# EAGLE board rpi_breakout (EAGLE 6.1)
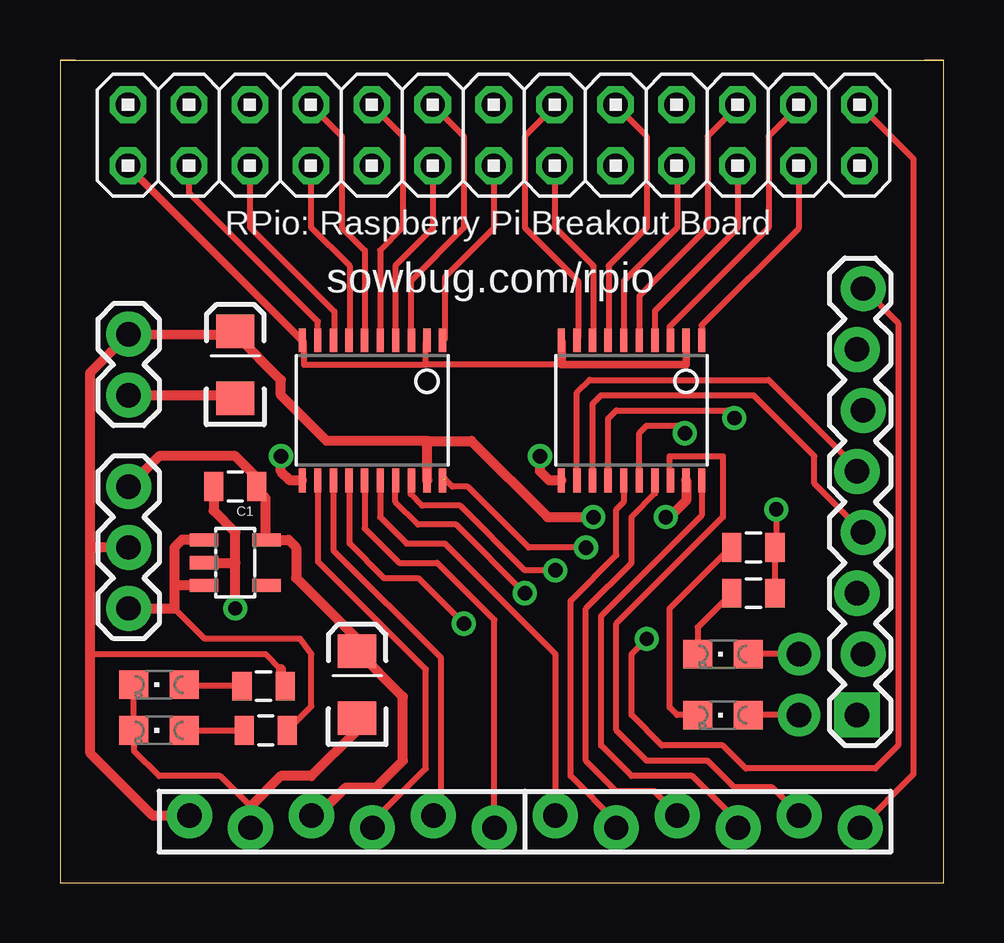
[diagram p0: board, top side]
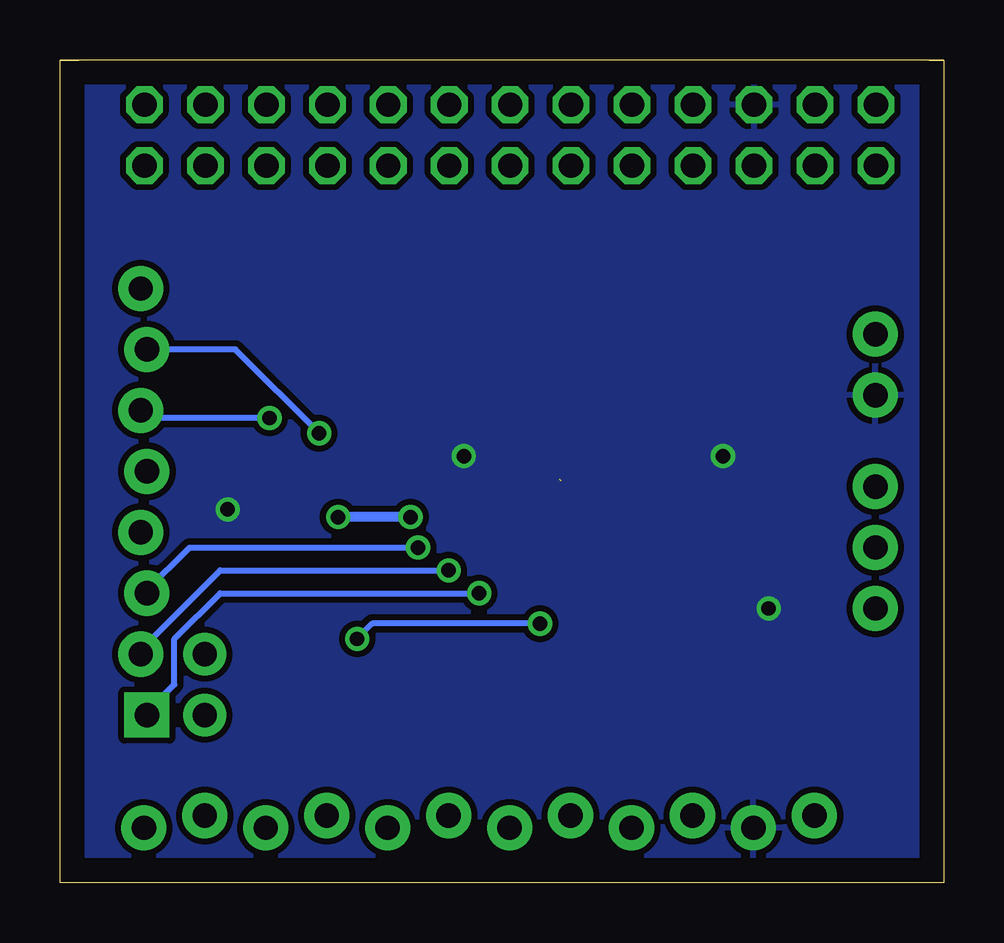
[diagram p1: board, bottom side, seen from below]

Size 36.83 x 34.29 mm. Coordinates in mm from the lower left corner, seen from the top.
Outline: 36.83,34.29 36.83,0 0,0 0,34.29
Outline: 36.83,34.29 36.04,34.29
Outline: 0.64,34.29 0,34.29
Outline: 0,34.29 36.83,34.29
Copper layers (1*16): Top 0.035mm / dielectric 1.5mm / Bottom 0.035mm
Design rules: minimum track width 10mil, minimum drill 24mil, track to track 8mil, track to pad 8mil, pad to pad 8mil, via to via 8mil, smd to smd 8mil, copper to edge 40mil, drill to drill 8mil, minimum pad ring 10mil, minimum via ring 8mil, stop-mask expansion 4mil, vias tented up to drill 0mil, thermal gap 10mil
Net classes: 0 default: width 0.254 mm, clearance 0.254 mm; 1 power/gnd: width 0.406 mm, clearance 0.254 mm; 2 skinny: width 0.203 mm, clearance 0.203 mm

## Footprints (pad centres in the part's own frame; a part is rotated, then mirrored left to right if it is on the bottom)
0805 = smd 0.8 x 1.2: 1 -0.9,0; 2 0.9,0
EIA3216 = smd 1.4 x 1.6: A 1.4,0; C -1.4,0
2X13 = drill 1.016 octagon: 1 -15.24,-1.27; 2 -15.24,1.27; 3 -12.7,-1.27; 4 -12.7,1.27; 5 -10.16,-1.27; 6 -10.16,1.27; 7 -7.62,-1.27; 8 -7.62,1.27; 9 -5.08,-1.27; 10 -5.08,1.27; 11 -2.54,-1.27; 12 -2.54,1.27; 13 0,-1.27; 14 0,1.27; 15 2.54,-1.27; 16 2.54,1.27; 17 5.08,-1.27; 18 5.08,1.27; 19 7.62,-1.27; 20 7.62,1.27; 21 10.16,-1.27; 22 10.16,1.27; 23 12.7,-1.27; 24 12.7,1.27; 25 15.24,-1.27; 26 15.24,1.27
1X08_LOCK = drill 1.016 pad 1.88 square: 1 0,0.127 | drill 1.016 pad 1.88: 2 2.54,-0.127; 3 5.08,0.127; 4 7.62,-0.127; 5 10.16,0.127; 6 12.7,-0.127; 7 15.24,0.127; 8 17.78,-0.127
1X06_FEMALE_LOCK.010 = drill 1.016 pad 1.88: 1 0,0.254; 2 2.54,-0.254; 3 5.08,0.254; 4 7.62,-0.254; 5 10.16,0.254; 6 12.7,-0.254
1X02 = drill 1.016 pad 1.88: 1 0,0; 2 2.54,0
1X03 = drill 1.016 pad 1.88: 1 0,0; 2 2.54,0; 3 5.08,0
1X01-CLEANBIG = drill 1.016 pad 1.778: 1 0,0
CHIPLED_0805 = smd 1.2 x 1.2: A 0,-1.05; C 0,1.05
TSSOP20 = smd 0.305 x 0.991: 1 -2.925,-2.918; 2 -2.275,-2.918; 3 -1.625,-2.918; 4 -0.975,-2.918; 5 -0.325,-2.918; 6 0.325,-2.918; 7 0.975,-2.918; 8 1.625,-2.918; 9 2.275,-2.918; 10 2.925,-2.918; 11 2.925,2.918; 12 2.275,2.918; 13 1.625,2.918; 14 0.975,2.918; 15 0.325,2.918; 16 -0.325,2.918; 17 -0.975,2.918; 18 -1.625,2.918; 19 -2.275,2.918; 20 -2.925,2.918
SOT-23-5 = smd 0.55 x 1.2: 1 -0.95,-1.3; 2 0,-1.3; 3 0.95,-1.3; 4 0.95,1.3; 5 -0.95,1.3

## Placement (x,y rotation side)
C1  0.1uF  [0805]  7.3,16.51 180 top
C2  10uF  [EIA3216]  12.38,8.26 90 top
C3  10uF  [EIA3216]  7.3,21.59 90 top
JP1  RPI  [2X13]  18.07,31.16 0 top
JP2  GPIO  [1X08_LOCK]  33.34,6.98 90 top
JP3  [1X06_FEMALE_LOCK.010]  5.4,2.54 0 top
JP4  [1X06_FEMALE_LOCK.010]  20.64,2.54 0 top
JP5  IO-PWR-EXT  [1X02]  2.86,22.86 270 top
JP6  VTG-SEL  [1X03]  2.86,16.51 270 top
JP7  [1X01-CLEANBIG]  30.8,9.53 0 top
JP8  [1X01-CLEANBIG]  30.8,6.98 0 top
LED1  CONNECTED  [CHIPLED_0805]  4.13,6.35 90 top
LED2  IO-POWER  [CHIPLED_0805]  4.13,8.26 90 top
LED3  BLINKY  [CHIPLED_0805]  27.62,9.53 90 top
LED4  BLINKY  [CHIPLED_0805]  27.62,6.98 90 top
R1  330  [0805]  8.57,6.35 180 top
R2  330  [0805]  8.48,8.19 180 top
R3  330  [0805]  28.89,12.06 0 top
R4  330  [0805]  28.89,13.97 0 top
U2  [TSSOP20]  23.81,19.69 180 top
U3  [TSSOP20]  13.02,19.69 180 top
VREG1  3.3V  [SOT-23-5]  7.3,13.33 270 top

## Library data of the parts
C1-C3 JP3-JP6 R1-R4 = SparkFun
JP1 = pinhead
JP2 U2 U3 = rpi_breakout
JP7 JP8 LED1-LED4 = adafruit
VREG1 = dp_devices

## Nets
3.3V [power/gnd]: C1.1 C2.A JP3.3 JP6.1 VREG1.5
3V3_RPI: JP1.1 U2.2 U2.10 U3.2 U3.10
5V [power/gnd]: JP6.3 R1.1 VREG1.1 VREG1.3
5V0: JP1.2
/SPI_CE0: JP1.24 U2.3
/SPI_CE1: JP1.26 JP4.6
/SPI_CEV0: JP4.5 U2.18
GND [power/gnd]: C1.2 C2.C C3.C JP1.6 JP3.2 JP5.2 LED1.C LED2.C R3.2 R4.2 U2.11 U3.11 VREG1.2
GPIO_0: JP1.11 U3.4
GPIO_1: JP1.12 U3.3
GPIO_2: JP1.13 U3.1
GPIO_3: JP1.15 U2.8
GPIO_4: JP1.16 U2.9
GPIO_5: JP1.18 U2.7
GPIO_6: JP1.22 U2.5
GPIO_7: JP1.7 U3.7
GPIOV_0: JP2.1 U3.17
GPIOV_1: JP2.2 U3.18
GPIOV_2: JP2.3 U3.20
GPIOV_3: JP2.4 U2.13
GPIOV_4: JP2.5 U2.12
GPIOV_5: JP2.6 U2.14
GPIOV_6: JP2.7 U2.16
GPIOV_7: JP2.8 U3.14
LED3_JP: JP7.1 LED3.A
LED4_JP: JP8.1 LED4.A
N$1: LED1.A R1.2
N$2: LED2.A R2.2
N$3: LED3.C R3.1
N$4: LED4.C R4.1
NC_0: JP1.4
NC_1: JP1.14
NC_2: JP1.20
NC_3: JP1.9
NC_4: JP1.17
NC_5: JP1.25
RXD: JP1.10 U3.5
RXDV: JP4.1 U3.16
SCL0: JP1.5 U3.8
SCLV0: JP3.5 U3.13
SDA0: JP1.3 U3.9
SDAV0 [skinny]: JP3.4 U3.12
SPI_MISO: JP1.21 U2.4
SPI_MISOV: JP4.3 U2.17
SPI_MOSI: JP1.19 U2.6
SPI_MOSIV: JP4.2 U2.15
SPI_SCLK: JP1.23 U2.1
SPI_SCLKV: JP4.4 U2.20
TXD: JP1.8 U3.6
TXDV: JP3.6 U3.15
VCC [power/gnd]: C3.A JP3.1 JP5.1 JP6.2 R2.1 U2.19 U3.19

## Tracks (layer width: path | path; a pad name or v marks a point on that pad's centre or on a via)
3.3V
  Top 0.254: 8.26,16.35 8.26,16.46 C1.1
  Top 0.406: VREG1.5 8.57,14.31 8.57,16.03 8.26,16.35 8.26,16.83 7.3,17.78 4.13,17.78 JP6.1 | VREG1.5 8.6,14.26 | JP3.3 10.64,2.95 10.89,2.95 11.91,3.97 13.18,3.97 14.29,5.08 14.29,7.75 C2.A 12.38,10.16 9.84,12.7 9.84,13.97 9.53,14.29 VREG1.5
3V3_RPI
  Top 0.254: JP1.1 2.83,29.86 | U3.10 10.16,22.54 10.16,21.59 15.24,21.59 | 15.24,21.59 15.24,22.54 U3.2 | U2.10 20.96,22.54 20.96,21.59 15.24,21.59
  Top 0.305: U2.10 20.89,21.59 20.96,21.59 26.09,21.59 U2.2 | U3.10 2.83,29.86 | U3.2
5V
  Top 0.254: 4.76,11.43 6.03,10.16 10,10.16 10.48,9.53 10.48,7.35 R1.1
  Top 0.406: JP6.3 4.76,11.43 4.76,12.22 | VREG1.1 5.08,14.29 4.76,13.97 4.76,12.22 | VREG1.3 4.92,12.38 4.76,12.22
/SPI_CE0
  Top 0.254: JP1.24 30.77,32.36 29.53,31.12 29.53,27.31 25.4,23.18 25.4,22.64 U2.3
/SPI_CE1
  Top 0.254: JP1.26 35.56,30.18 35.56,4.52 JP4.6
/SPI_CEV0
  Top 0.254: U2.18 25.4,16.81 25.4,17.78 27.62,17.78 27.62,15.24 23.18,10.79 23.18,6.35 24.45,5.08 26.99,5.08 28.1,3.97 29.69,3.97 30.8,2.86 JP4.5
GND  (via drill 0.6)
  Top 0.254: R3.2 R4.2 29.85,13.97 v29.85,15.56 | 7.94,3.17 6.67,4.45 4.13,4.45 3.08,5.5 LED1.C LED2.C
  Top 0.406: VREG1.2 7.3,13.33 | U3.11 9.58,16.77 9.21,17.15 v9.21,17.78 | C1.2 6.4,15.5 7.3,14.61 7.3,13.33 | v7.3,11.43 7.3,13.33 | JP5.2 7.17,20.32 C3.C 7.3,19.69 | JP3.2 7.94,3.17 9.21,4.45 10.48,4.45 12.38,6.35 C2.C | U2.11 20.38,16.77 20,17.15 v20,17.78
  pour Bottom: 0,0 36.83,0 36.83,34.29 0,34.29
GPIO_0
  Top 0.254: JP1.11 15.53,27.28 13.97,25.72 13.97,22.62 U3.4
GPIO_1
  Top 0.254: JP1.12 15.53,32.41 16.83,31.12 16.83,27.31 14.61,25.08 14.61,22.54 14.64,22.58 U3.3
GPIO_2
  Top 0.254: JP1.13 18.07,27.28 16.03,25.24 16.03,22.67 U3.1
GPIO_3
  Top 0.254: JP1.15 20.61,27.33 22.23,25.72 22.23,22.64 U2.8
GPIO_4
  Top 0.254: JP1.16 20.61,32.36 19.37,31.12 19.37,27.31 21.59,25.08 21.59,22.86 | 21.59,22.86 21.59,22.7 | U2.9 21.54,22.81 21.59,22.86
GPIO_5
  Top 0.254: JP1.18 23.15,32.41 24.45,31.12 24.45,27.31 22.86,25.72 22.86,22.62 U2.7
GPIO_6
  Top 0.254: JP1.22 28.23,32.36 26.99,31.12 26.99,27.31 24.14,24.46 U2.5
GPIO_7
  Top 0.254: JP1.7 10.45,27.33 12.06,25.72 12.06,22.62 U3.7
GPIOV_0  (via drill 0.6)
  Top 0.254: 13.97,16.75 U3.17 13.99,16.53 13.97,16.51 | v19.37,12.06 16.51,14.92 14.92,14.92 13.97,15.88 13.97,16.51 | 13.97,16.51 13.97,16.83
  Bottom 0.254: v19.37,12.06 30.16,12.06 32.07,10.16 32.07,8.26 33.21,7.11 JP2.1
GPIOV_1  (via drill 0.6)
  Top 0.254: U3.18 14.61,16.73 14.61,16.19 15.08,15.72 16.67,15.72 19.37,13.02 v20.64,13.02
  Bottom 0.254: v20.64,13.02 30.16,13.02 33.43,9.75 33.43,9.59 JP2.2
GPIOV_2  (via drill 0.6)  (1 unrouted)
  Top 0.254: U3.20 15.97,16.77 | v21.92,13.97 19.53,13.97 16.99,16.51 16.35,16.51 16.03,16.83
  Bottom 0.254: v21.92,13.97 31.43,13.97 33.27,12.13 | JP2.3 33.27,12.13 | 33.27,12.13 33.34,12.06
GPIOV_3
  Top 0.254: U2.13 22.19,19.96 22.54,20.32 28.89,20.32 31.43,17.78 31.43,16.64 JP2.4
GPIOV_4
  Top 0.254: U2.12 21.54,20.43 22.07,20.96 29.53,20.96 33.21,17.27 JP2.5
GPIOV_5  (via drill 0.6)
  Top 0.254: U2.14 22.84,19.35 23.18,19.69 27.78,19.69 v28.1,19.37
  Bottom 0.254: v28.1,19.37 33.02,19.37 33.34,19.69 JP2.6
GPIOV_6  (via drill 0.6)
  Top 0.254: U2.16 24.14,18.74 24.45,19.05 25.72,19.05 v26.04,18.73
  Bottom 0.254: v26.04,18.73 29.53,22.23 JP2.7
GPIOV_7  (via drill 0.6)
  Top 0.254: JP2.8 33.44,24.82 34.92,23.34 34.92,5.71 33.97,4.76 28.58,4.76 27.62,5.71 25.08,5.71 23.81,6.98 23.81,9.53 v24.45,10.16 | U3.14 12.06,16.75 12.06,14.13 13.49,12.7 14.92,12.7 v16.83,10.79
  Bottom 0.254: v16.83,10.79 23.81,10.79 v24.45,10.16
LED3_JP
  Top 0.254: JP7.1 LED3.A
LED4_JP
  Top 0.254: JP8.1 LED4.A
N$1
  Top 0.254: LED1.A R1.2
N$2
  Top 0.254: R2.2 5.24,8.2 LED2.A
N$3
  Top 0.254: R3.1 26.57,10.64 LED3.C
N$4
  Top 0.254: LED4.C 25.72,6.98 25.4,7.3 25.4,11.43 27.94,13.97 R4.1 28.26,13.97
RXD
  Top 0.254: JP1.10 12.99,32.41 14.29,31.12 14.29,27.31 13.33,26.35 13.33,22.86 | 13.33,22.86 13.33,22.7 | U3.5 13.34,22.85 13.33,22.86
RXDV
  Top 0.254: U3.16 13.34,15.23 14.45,14.13 16.03,14.13 20.64,9.53 JP4.1
SCL0
  Top 0.254: JP1.5 7.91,27.33 11.43,23.81 11.43,22.64 U3.8
SCLV0
  Top 0.254: U3.13 11.39,13.85 15.88,9.37 15.88,3.11 JP3.5
SDA0
  Top 0.254: JP1.3 5.37,28.76 10.74,23.39 U3.9
SDAV0
  Top 0.254: U3.12 10.74,13.39 15.24,8.89 15.24,4.76 13.02,2.54 JP3.4
SPI_MISO
  Top 0.254: JP1.21 28.23,27.28 24.79,23.84 U2.4
SPI_MISOV
  Top 0.254: U2.17 24.79,16.21 23.81,15.24 23.81,13.33 21.91,11.43 21.91,5.08 23.18,3.81 24.13,3.81 24.77,3.81 25.72,2.86 JP4.3
SPI_MOSI
  Top 0.254: JP1.19 25.72,29.86 25.72,27.31 23.5,25.08 U2.6 | 23.5,22.54 U2.6 | U2.6
SPI_MOSIV
  Top 0.254: U2.15 23.49,15.87 23.18,15.56 23.18,13.65 21.27,11.75 21.27,4.45 23.18,2.54 JP4.2
SPI_SCLK
  Top 0.254: JP1.23 30.77,27.27 26.74,23.24 U2.1
SPI_SCLKV
  Top 0.254: U2.20 26.74,15.31 22.54,11.11 22.54,5.71 23.81,4.45 26.35,4.45 28.26,2.54 JP4.4
TXD
  Top 0.254: JP1.8 10.45,32.41 11.75,31.12 11.75,27.31 12.7,26.35 12.7,22.86 | 12.7,22.86 12.7,22.7 | U3.6 12.69,22.85 12.7,22.86
TXDV
  Top 0.254: U3.15 12.69,14.77 14.13,13.33 15.72,13.33 18.1,10.95 JP3.6
VCC  (via drill 0.6)
  Top 0.254: 1.27,9.53 8.57,9.53 9.21,8.89
  Top 0.406: 15.3,18.42 U3.19 15.29,18.36 15.24,18.42 | 15.3,18.42 15.24,18.42 | 15.3,18.42 17.15,18.42 20.32,15.24 v22.23,15.24 | v25.24,15.24 25.4,15.24 26.09,15.93 U2.19 | JP6.2 1.27,13.97 | 9.21,8.89 9.21,8.37 R2.1 | 1.27,13.97 1.27,21.27 JP5.1 6.05,22.84 7.15,22.84 C3.A 7.3,22.86 9.21,20.96 9.21,20.32 11.11,18.42 15.24,18.42 | JP3.1 3.87,2.79 1.27,5.4 1.27,9.53 1.27,13.97
  Bottom 0.406: v22.23,15.24 v25.24,15.24

## Text on the board
tPlace: RPio: Raspberry Pi Breakout Board | sowbug.com/rpio